# Altium PCB ARM2.22.PcbDoc (part 2 of 2)
Units mil, origin at the board's own origin, x right, y up, seen from the top; angles counter-clockwise.
Board outline 3929.03 x 3937.01 mil, 4 copper layers (Top Layer, GND, VCC, Bottom Layer); 147 components, 96 nets, 586 pads, 207 vias.
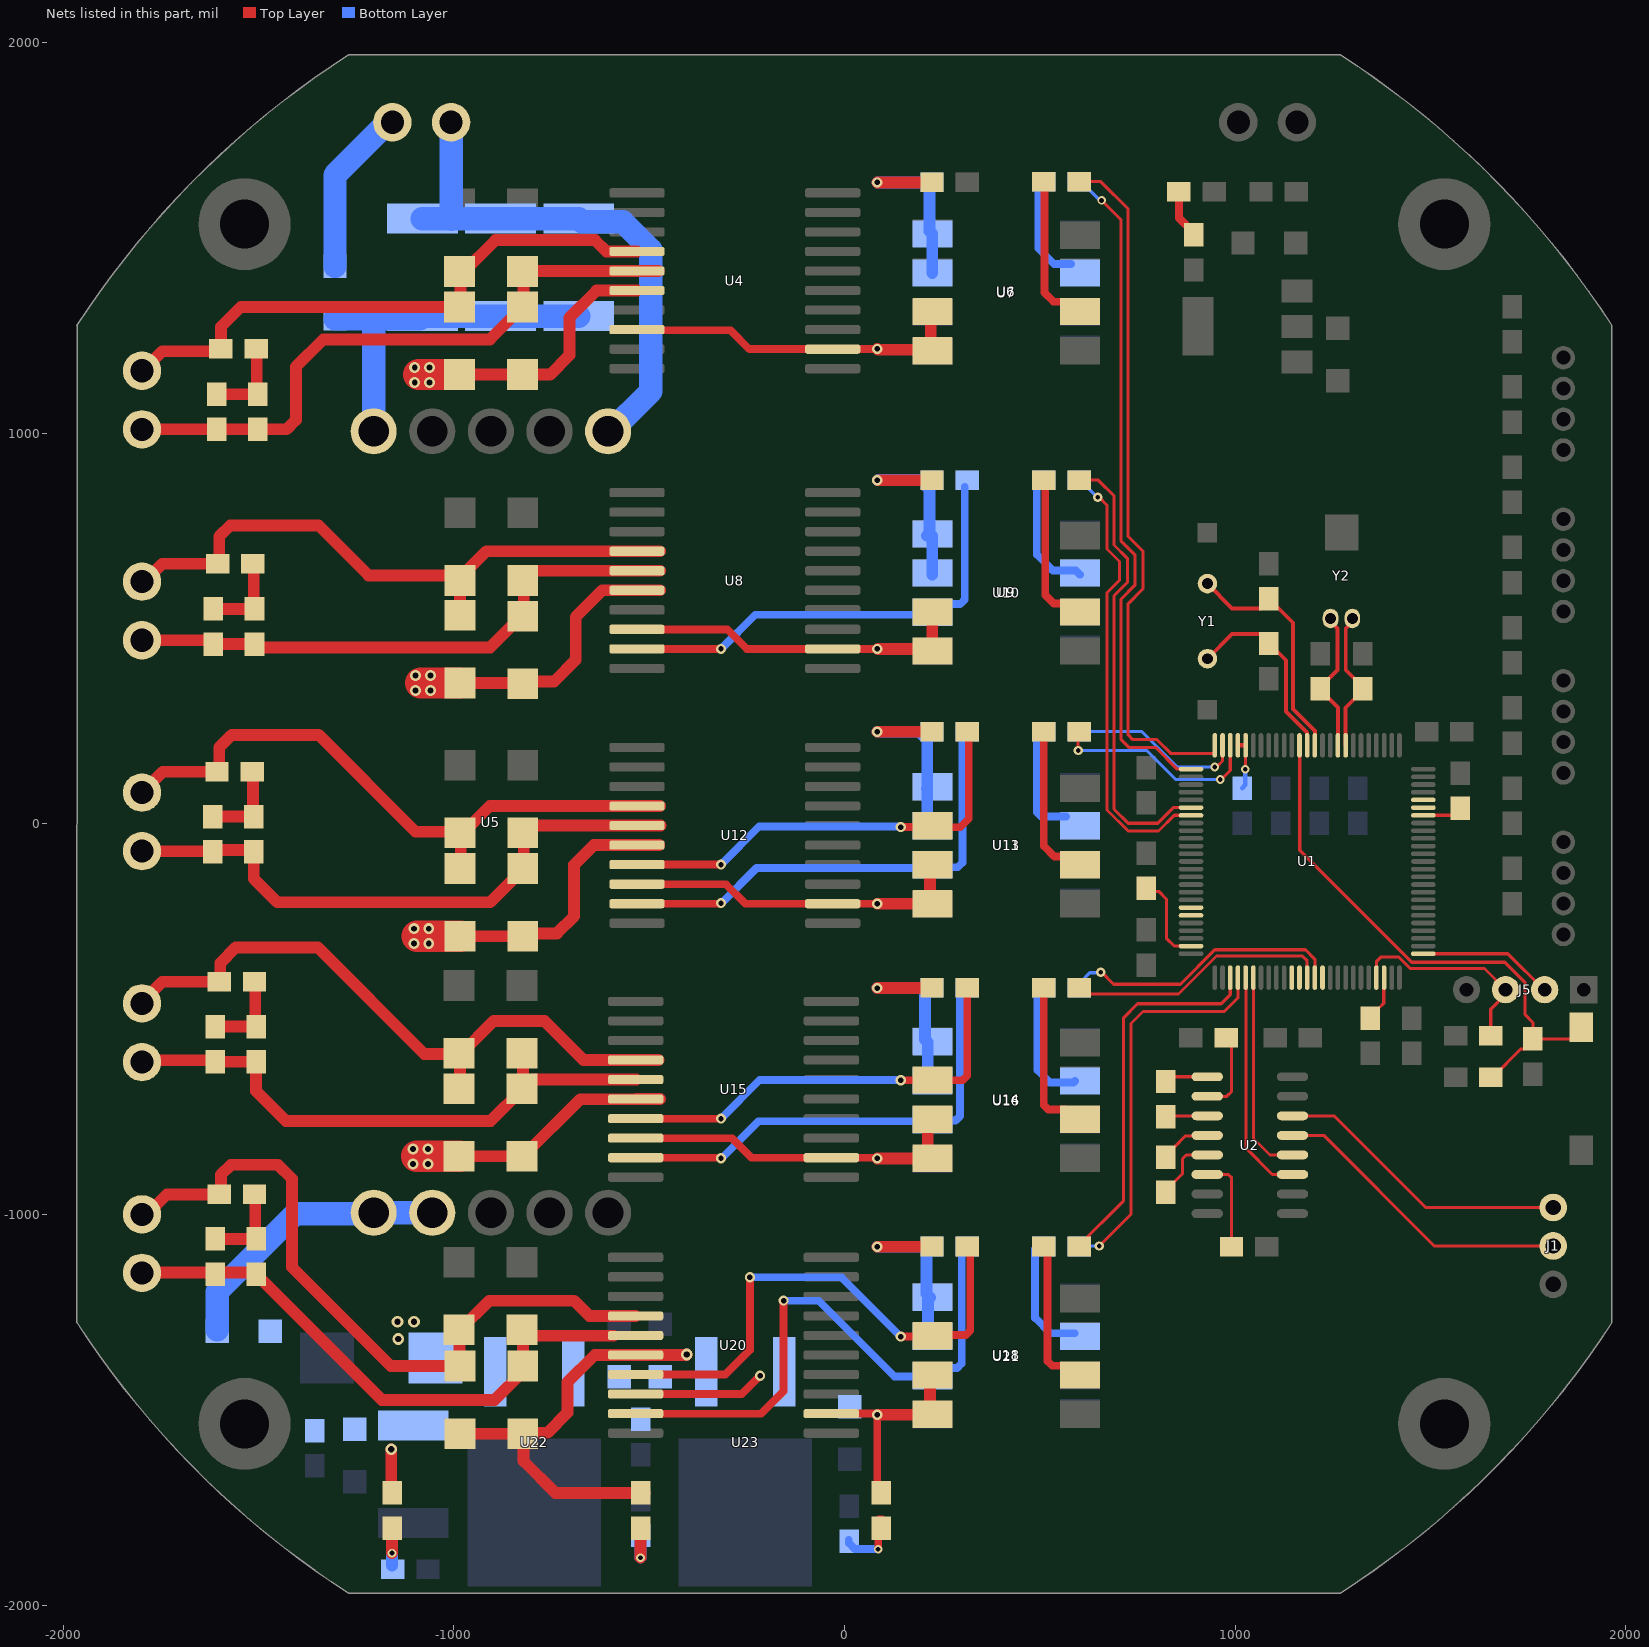
[diagram p4: the nets of this part, all layers, seen from the top]

## Via types
v1: diameter 22, hole 12, Top Layer to Bottom Layer, 101 vias
v2: diameter 26, hole 14, Top Layer to Bottom Layer, 77 vias
v3: diameter 28, hole 15, Top Layer to Bottom Layer, 16 vias
v4: diameter 24, hole 12, Top Layer to Bottom Layer, 8 vias
v5: diameter 30, hole 16, Top Layer to Bottom Layer, 5 vias

## Nets (pads, with @x,y where several pads share a name; then routed paths per layer and width w, separated by ;. In a path a pad name is that pad's centre, name@x,y a point inside that pad or via, vN(x,y) a via of type N, cw(c..) or ccw(c..) an arc to the next point about the centre after c; other vN are vias at no path point) (continued)
IN4: R20.2 U8.9 U10.6 | length 1178.2
  Top Layer w20: U8.9@-531.13,448.21 -531.03,448.11 -316.11,448.11 v2(-316,448)
  Bottom Layer w20: v2(-316,448) -228.28,535.72 U10.6@224.88,535.72 ; U10.6@224.88,537.72 249.92,562.76 295.98,562.76 307.7,574.48 R20.2@307.7,862.19
IN5: R22.2 U11.6 U12.7 | length 1122.1
  Top Layer w20: U12.7@-531.13,-104 v2(-316,-104) ; v2(144,-8) 214.58,-8 216.58,-6 218.86,-8.28 296,-8.28 318,13.72 318,221.32 303,236.32 R22.2@301.38,236.32
  Bottom Layer w20: v2(-316,-104) -218,-6 v2@135.04,-6
IN6: R24.2 U12.9 U13.6 | length 1211.2
  Top Layer w20: U12.9@-531.13,-204 v2@-316,-204
  Bottom Layer w20: v2@-316.77,-201.54 v2(-316,-202.31) -314.53,-202.31 -225,-112.78 U13.6@218.88,-112.78 ; U13.6@218.88,-110.78 289.98,-110.78 301.7,-99.07 R24.2@301.7,236.32
IN7: R27.2 U14.6 U15.7 | length 1118.8
  Top Layer w20: U15.7@-533.13,-754.21 v2@-316,-754.21 ; v2@142.85,-654.85 v2(144,-656) 213.14,-656 213.19,-655.94 302.28,-655.94 314,-644.23 314,-440.21 R27.2@299,-425.21
  Bottom Layer w20: v2(-316,-754) -216.85,-654.85 v2@142.85,-654.85
IN8: R30.2 U15.9 U16.6 | length 1193.6
  Top Layer w20: U15.9@-533.13,-854.21 v2@-316,-854.21
  Bottom Layer w20: v2@-314.38,-855.47 -219.85,-760.95 U16.6@213.22,-760.95 ; U16.6@213.22,-758.95 284.32,-758.95 296.04,-747.23 R30.2@296.04,-425.21
  other v2: -316,-855.47
IN9: R34.2 U18.6 U20.7 | length 1362.9
  Top Layer w20: U20.7@-534.67,-1409.06 -305.06,-1409.06 -242,-1346 v2(-242,-1160) ; v2(144,-1312) 216.64,-1312 220.43,-1308.22 310.28,-1308.22 322,-1296.5 R34.2@322,-1096.35 ; R34.2@309.68,-1081.35 313,-1081.35 R34.2@328,-1096.35
  Bottom Layer w20: v2(-242,-1160) -8,-1160 v2(144,-1312)
IN10: R36.2 U20.9 U21.6 | length 1469.7
  Top Layer w20: U20.9@-534.67,-1509.06 -534.2,-1509.53 -213.53,-1509.53 -156,-1452 v2(-156,-1220)
  Bottom Layer w20: v2(-156,-1220) -66,-1220 127.72,-1413.72 U21.6@218.86,-1413.72 ; U21.6@218.86,-1411.72 238.44,-1392.14 288.28,-1392.14 300,-1380.42 R36.2@300,-1094.65
INPUT1: R13.1 U1.25 | length 1794.4
  Top Layer w8: R13.1@600.36,1644.06 655.94,1644.06 726,1574 726,736 764,698 764,602 726,564 726,228 738,216 800,216 836,180 946.23,180 947.99,181.76 U1.25@947.99,201.37
INPUT2: R16.1 U1.26 | length 1712.3
  Top Layer w8: v1(658,1596) 708,1546 708,724 744,688 744,612 708,576 708,216 728,196 796,196 851.65,140.35 U1.26@886.97,140.35
  Bottom Layer w8: R16.1@599.81,1628.06 621.36,1628.06 650.74,1598.68 655.32,1598.68 v1(658,1596)
INPUT3: R18.1 U1.31 | length 1167.2
  Top Layer w8: R18.1@598,880.19 649.81,880.19 690,840 690,714 724,680 724,618 690,584 690,38 726,2 802,2 841.93,41.93 U1.31@886.97,41.93
INPUT4: R21.1 U1.32 | length 1149.6
  Top Layer w8: v4(648,836) 652,836 672,816 672,704 704,672 704,624 672,592 672,36 726,-18 803.61,-18 843.85,22.24 U1.32@886.97,22.24
  Bottom Layer w8: R21.1@602,862.19 621,862.19 647.19,836 v4(648,836)
INPUT5: R23.1 U1.23 | length 541.8
  Top Layer w8: v4(598,188) R23.1@598,235.68 ; v1(962,114) 964.57,114 987.35,136.78 U1.23@987.35,201.44
  Bottom Layer w8: v4(598,188) 774,188 848,114 v1(962,114)
INPUT6: R26.1 U1.24 | length 455.3
  Top Layer w8: v1(948,146) 950.68,148.68 955.19,148.68 967.67,161.15 U1.24@967.67,201.37 U1.24@967.67,201.37
  Bottom Layer w8: R26.1@596.36,236.32 761.68,236.32 852,146 v1(948,146)
INPUT7: R28.1 U1.63 | length 694.5
  Top Layer w8: R28.1@584.34,-419.21 600.12,-435 855,-435 952,-338 1172,-338 1184.21,-350.21 U1.63@1184.21,-393.11
INPUT8: R31.1 U1.64 | length 728.2
  Top Layer w8: v4(655.98,-379.54) 658.16,-379.54 688.63,-410 860,-410 948,-322 1180,-322 1203.89,-345.89 U1.64@1203.89,-393.11
  Bottom Layer w8: R31.1@604,-416.33 604,-404.55 627.98,-380.57 654.94,-380.57 v4(655.98,-379.54)
INPUT9: R35.1 U1.53 | length 975.3
  Top Layer w8: R35.1@597,-1081.35 714.36,-964 714.36,-495.64 750,-460 964,-460 987.36,-436.64 U1.53@987.36,-393.11
INPUT10: R37.1 U1.54 | length 1014.4
  Top Layer w8: v4(652,-1080) 733.36,-998.64 733.36,-510.64 764,-480 972,-480 1007.04,-444.96 U1.54@1007.04,-393.11
  Bottom Layer w8: R37.1@593.35,-1080 v4(652,-1080)
INPUT_CeTui1: U1.95
INPUT_CeTui2: U1.96
INPUT_CeTui3: U1.44
INPUT_CeTui4: U1.45
INPUT_DuoJi1: U1.61
INPUT_DuoJi2: U1.62
INPUT_ZhuTui: U1.65
NetC8_2: C8.2 U1.49 | length 234.6
  Top Layer w8: C8.2@772,-165 779.31,-172.31 804.31,-172.31 824,-192 824,-292 844.41,-312.41 U1.49@886.97,-312.41
NetC9_2: C9.2 U1.73 | length 110.1
  Top Layer w8: C9.2@1346,-493 1346,-492 1367,-471 1368,-471 1380.33,-458.67 U1.73@1380.33,-397.67
NetC11_1: C11.1 U2.3 | length 106
  Top Layer w8: C11.1@822.59,-747 U2.3@928.55,-747
NetC11_2: C11.2 U2.1 | length 104.6
  Top Layer w8: C11.2@824,-647 U2.1@928.55,-647
NetC14_1: C14.1 U2.2 | length 217.6
  Top Layer w8: U2.2@928.55,-697 978.59,-697 990.59,-685 990.59,-557 C14.1@974.59,-541
NetC19_1: C19.1 U2.5 | length 171.3
  Top Layer w8: C19.1@822.59,-943 822.59,-938 865,-895.59 865,-857 875,-847 U2.5@928.55,-847
NetC19_2: C19.2 U2.4 | length 132.1
  Top Layer w8: C19.2@822.59,-853 822.59,-848 843.59,-827 872.01,-798.58 926.97,-798.58 U2.4@928.55,-797
NetC20_2: C20.2 U2.6 | length 242.4
  Top Layer w8: U2.6@928.55,-897 982.59,-897 990.79,-905.2 C20.2@990.79,-1082
NetC23_1: C23.1 C24.1 C25.1 F1.2 U5.1 | length 905.6
  Bottom Layer w60: F1.2@-1304,1293 -1086.77,1293 C25.1@-1080.15,1299.62 C24.1@-880.15,1299.62 C23.1@-680.15,1299.62 ; U5.1@-1205,1005 -1205,1284
NetC23_2: C23.2 C24.2 C25.2 J9.1 U5.5 | length 1377.6
  Bottom Layer w60: C25.2@-1080.15,1549.62 C25.2@-1007,1549.62 ; C25.2@-1007,1548 C25.2@-1007,1549.62 ; J9.1@-1007,1791.55 C25.2@-1007,1549.62 ; U5.5@-605,998.2 -496,1107.2 -496,1470 -567.24,1541.24 -671.76,1541.24 C23.2@-680.15,1549.62 C24.2@-880.15,1549.62 C25.2@-1007,1549.62
NetDS1_2: DS1.2 DS2.1 R14.1 | length 222.7
  Top Layer w30: DS2.1@-1607,1100 DS1.2@-1502,1100 -1504,1102 -1504,1214 R14.1@-1506,1216
NetDS3_2: DS3.2 DS4.1 R19.1 | length 222.2
  Top Layer w30: DS4.1@-1615,550.5 DS3.2@-1510,550.5 -1512,552.5 -1512,664 R19.1@-1514,666
NetDS5_2: DS5.2 DS6.1 R25.1 | length 221.7
  Top Layer w30: DS6.1@-1617,19 DS5.2@-1512,19 -1514,21 -1514,132 R25.1@-1516,134
NetDS7_2: DS7.2 DS8.1 R32.1 | length 221.2
  Top Layer w30: DS8.1@-1611,-518.5 DS7.2@-1506,-518.5 -1508,-516.5 -1508,-406 R32.1@-1510,-404
NetDS9_2: DS9.2 DS10.1 R38.1 | length 220.7
  Top Layer w30: DS10.1@-1611,-1062 DS9.2@-1506,-1062 -1508,-1060 -1508,-950 R38.1@-1510,-948
NetF1_1: F1.1 J9.2 | length 426.7
  Bottom Layer w60: F1.1@-1304,1428 -1304,1661 J9.2@-1167,1798
NetF2_1: F2.1 U5.9 U5.10 | length 730.7
  Bottom Layer w60: F2.1@-1605,-1294 -1605,-1197 -1405.4,-997.4 -1207.4,-997.4 U5.10@-1205,-995 U5.9@-1055,-995
NetLED1_1: LED1.1 R4.1 | length 125.7
  Top Layer w20: LED1.1@856,1618 856,1551 894,1513 R4.1@894,1508
NetLED2_2: LED2.2 R29.1 | length 96
  Top Layer w30: v1(-1158,-1866) LED2.2@-1158,-1802
  Bottom Layer w30: R29.1@-1158,-1898 v1(-1158,-1866)
NetLED3_2: LED3.2 R41.1 | length 134
  Top Layer w30: v1(-522,-1878) LED3.2@-522,-1802
  Bottom Layer w30: v1(-522,-1878) R41.1@-522,-1820
NetLED4_2: LED4.2 R42.1 | length 174.8
  Top Layer w20: v1(86,-1856) 86.38,-1855.62 86.38,-1782.38 86,-1782 88,-1780 LED4.2@96,-1780
  Bottom Layer w20: R42.1@11,-1832 11,-1840 27,-1856 v1(86,-1856)
NetR2_1: R2.1 U1.94 | length 80.8
  Top Layer w8: U1.94@1481.45,22.24 R2.1@1562.24,22.24
NetR13_2: R13.2 U6.2 | length 341.5
  Top Layer w20: R13.2@512,1630.06 512,1360 535.24,1336.76 U6.2@573.78,1336.76
NetR16_2: R16.2 U7.2 | length 265
  Bottom Layer w20: R16.2@496,1638 496,1474 536.99,1433.01 U7.2@580.05,1433.01
NetR18_2: R18.2 U9.2 | length 372.9
  Top Layer w20: R18.2@508,880.19 514,874.19 514,586 535.73,564.27 U9.2@581.27,564.27
NetR21_2: R21.2 U10.2 | length 329.9
  Bottom Layer w20: R21.2@508,880.19 507,880.19 492,865.19 492,690 533.38,648.62 591.94,648.62 U10.2@602.84,637.72
NetR23_2: R23.2 U11.2 | length 347.4
  Top Layer w20: R23.2@510,218.32 510,-56 537.24,-83.24 U11.2@571.78,-83.24
NetR26_2: R26.2 U13.2 | length 267.7
  Bottom Layer w20: R26.2@492,218.32 492,30.64 503.72,18.92 U13.2@567.14,18.92
NetR28_2: R28.2 U14.2 | length 354.9
  Top Layer w20: R28.2@510,-425.21 510,-719.19 521.72,-730.91 U14.2@566.11,-730.91
NetR31_2: R31.2 U16.2 | length 321.1
  Bottom Layer w20: R31.2@494.34,-419.21 494.34,-630.33 525.44,-661.44 586.56,-661.44 U16.2@590,-658
NetR35_2: R35.2 U18.2 | length 365.1
  Top Layer w20: R35.2@502,-1081.35 505,-1081.35 520,-1096.35 520,-1375.02 531.72,-1386.74 U18.2@577.34,-1386.74
NetR37_2: R37.2 U21.2 | length 306.8
  Bottom Layer w20: R37.2@497.88,-1078 488,-1087.88 488,-1264 527.35,-1303.35 U21.2@588.45,-1303.35
OSC32IN: C17.2 U1.8 Y2.1 | length 367.4
  Top Layer w10: U1.8@1282.64,201.37 1282.64,297.64 1326,341 1326,351 1283,394 1283,500.14 1300,517.14 Y2.1@1300,526
OSC32OUT: C18.2 U1.9 Y2.2 | length 369
  Top Layer w10: Y2.2@1244,526 1244,518.14 1262,500.14 1262,394 1239,371 1238,371 1220,353 1220,339 1238,321 1240,321 1262.95,298.05 U1.9@1262.95,201.37
OSCIN: C15.2 U1.12 Y1.1 | length 620.9
  Top Layer w10: Y1.1@929,615.13 992.13,552 1066,552 1086,572 1086,577 1148,515 1148,294 1203.89,238.11 U1.12@1203.89,201.37
OSCOUT: C16.2 U1.13 Y1.2 | length 495.7
  Top Layer w10: Y1.2@929,423 992,486 1068,486 C16.2@1086,468 ; C16.2@1084,465 1130,419 1130,288 1183.86,234.14 1183.86,201.72 U1.13@1184.21,201.37
OUT1: D1.2 D3.1 J10.1 R14.2 U4.4 | length 1485.7
  Top Layer w30: J10.1@-1796.21,1160 -1746.21,1210 -1602,1210 R14.2@-1596,1216 -1596,1272 -1544.59,1323.41 D1.2@-985.15,1323.41 ; D1.2@-982.85,1323.41 D3.1@-982.85,1406.61 ; D3.1@-975.7,1412.19 -893.09,1494.8 -638.8,1494.8 -609.38,1465.38 U4.4@-531.13,1465.38
OUT2: D2.2 D4.1 DS1.1 DS2.2 J10.2 U4.5 | length 1589
  Top Layer w30: J10.2@-1798,1010 DS1.1@-1502,1010 -1428,1010 -1404,1034 -1404,1170 -1334,1240 -907.41,1240 D2.2@-824,1323.41 ; D4.1@-837.7,1399.09 D4.1@-822.85,1413.94 ; D2.2@-821.7,1347.78 D4.1@-821.7,1401.09 ; D4.1@-807.25,1415.38 U4.5@-531.13,1415.38 U4.5@-476,1415.38
OUT3: D5.2 D7.1 J11.1 R19.2 U8.4 | length 1590.8
  Top Layer w30: J11.1@-1790.96,631.25 -1780.96,631.25 -1746.21,666 R19.2@-1604,666 -1600,670 -1600,736 -1572,764 -1346,764 -1218,636 -990,636 -984.26,630.26 D7.1@-982,628 ; D7.1@-987.17,627.35 -916.31,698.21 U8.4@-531.13,698.21 U8.4@-472,698.21 ; D5.2@-984.3,540 D7.1@-984.3,623.35 D7.1@-984.3,627.35
OUT4: D6.2 D8.1 DS3.1 DS4.2 J11.2 U8.5 | length 1428.8
  Top Layer w30: J11.2@-1798,470.25 -1624.75,470.25 DS4.2@-1615,460.5 DS3.1@-1510,460.5 DS3.1@-1510,455.5 ; -1481.63,452 -906.85,452 -820.85,538 D8.1@-820.85,627.35 ; D8.1@-817.99,648.21 U8.5@-531.13,648.21 U8.5@-472,648.21
OUT5: D9.2 D11.1 J12.1 R25.2 U12.4 | length 1671.9
  Top Layer w30: J12.1@-1798,80.5 -1744.5,134 R25.2@-1606,134 -1600,140 -1600,196 -1568,228 -1346,228 -1098,-20 -986,-20 D11.1@-981.83,-24.17 ; D9.2@-1006.3,-136 D9.2@-984.3,-114 ; D9.2@-982,-114 -982,-28.65 -907.35,46 U12.4@-531.13,46 U12.4@-472,46
OUT6: D10.2 D12.1 DS5.1 DS6.2 J12.2 U12.5 | length 1561.5
  Top Layer w30: J12.2@-1798,-69.5 DS6.2@-1625,-69.5 ; DS6.2@-1627,-57.5 -1617,-67.5 DS6.2@-1617,-71 ; DS6.2@-1617,-66.5 DS5.1@-1512,-66.5 ; DS5.1@-1512,-71 -1512,-140 -1452,-200 -906.85,-200 -820.85,-114 -820.85,-30.65 -794.2,-4 U12.5@-531.13,-4 U12.5@-470,-4
OUT7: D13.2 D15.1 J14.1 R32.2 U15.4 | length 1678.1
  Top Layer w30: J14.1@-1796,-444.25 -1786.46,-444.25 -1746.21,-404 R32.2@-1600,-404 -1598,-402 -1598,-356 -1558,-316 -1348,-316 -1075.35,-588.65 -993.35,-588.65 -991.35,-590.65 D15.1@-984,-590.65 ; D13.2@-984,-677.39 D15.1@-984,-590.65 ; U15.4@-476,-604 -532.92,-604 -533.13,-604.21 -667.79,-604.21 -768,-504 -897.35,-504 D15.1@-984,-590.65
OUT8: D14.2 D16.1 DS7.1 DS8.2 J14.2 U15.5 | length 1503.5
  Top Layer w30: J14.2@-1798,-609.25 -1793.25,-604.5 DS8.2@-1611,-604.5 ; DS8.2@-1611,-608.5 DS7.1@-1506,-608.5 -1506,-684 -1430,-760 -905.46,-760 -822.85,-677.39 D16.1@-822.85,-590.65 ; D14.2@-821.85,-677.58 -798.48,-654.21 U15.5@-533.13,-654.21
OUT9: D18.2 D20.1 J15.1 R38.2 U20.4 | length 1811.8
  Top Layer w30: J15.1@-1798,-999 -1785,-999 -1734,-948 R38.2@-1600,-948 -1596,-944 -1596,-898 -1570,-872 -1450,-872 -1414,-908 -1414,-1134 -1160.61,-1387.39 D18.2@-984.3,-1387.39 ; D18.2@-986.3,-1370 -985.3,-1369 -985.3,-1295.61 D20.1@-986.3,-1294.61 ; D20.1@-984,-1294.61 -909.39,-1220 -692,-1220 -652.94,-1259.06 U20.4@-534.67,-1259.06
OUT10: D19.2 D21.1 DS9.1 DS10.2 J15.2 U20.5 | length 1475.9
  Top Layer w30: J15.2@-1796,-1148 -1611,-1148 DS9.1@-1502,-1148 ; DS9.1@-1506,-1152 -1506,-1157 -1496,-1167 -1491,-1167 -1184,-1474 -895.46,-1474 -822.85,-1401.39 D21.1@-822.85,-1310 ; D21.1@-825.15,-1294.61 -809.76,-1310 U20.5@-590.54,-1310
RST: C21.1 K1.1 R3.1 U1.14 | length 1428.7
  Top Layer w8: U1.14@1164.52,201.37 1165.25,200.72 1165.25,-67.25 1452,-354 1690,-354 1742,-406 1742,-488 1762,-508 C21.1@1762,-550 ; R3.1@1654,-648 1659,-648 1731,-576 1741,-576 1762,-555 C21.1@1762,-550 ; K1.1@1885.74,-520 1885.74,-524.47 1860.21,-550 C21.1@1762,-550
RXA: J1.2 U2.13 | length 784.6
  Top Layer w8: U2.13@1146.59,-797 1226.59,-797 1509.59,-1080 J1.2@1814,-1080
RXD: U1.56 U2.12 | length 528.9
  Top Layer w8: U1.56@1047,-393.11 1047,-805 1089,-847 U2.12@1146.59,-847
SWCLK: J5.2 U1.76 | length 354.7
  Top Layer w8: U1.76@1481.45,-332.09 1698,-332.09 1791.5,-425.59 J5.2@1791.5,-431.5
SWDIO: J5.3 R11.1 U1.72 | length 537.2
  Top Layer w8: U1.72@1361.38,-393.11 1361.38,-352.62 1374,-340 1418,-340 1448,-370 1638,-370 J5.3@1692,-424 ; R11.1@1654,-542 1654,-473.84 1691.5,-436.34 J5.3@1691.5,-431.5
TXA: J1.1 U2.14 | length 764.6
  Top Layer w8: U2.14@1146.59,-747 1253,-747 1487.59,-981.59 J1.1@1814,-981.59
TXD: U1.55 U2.11 | length 583.3
  Top Layer w8: U1.55@1027.32,-393.11 1027.32,-829 1095.32,-897 U2.11@1146.59,-897
VCC_5V: C32.1 LED4.1 R12.1 R15.1 R17.1 R20.1 R22.1 R24.1 R27.1 R30.1 R34.1 R36.1 U4.8 U4.12 U6.7 U6.8 U7.7 U7.8 U8.8 U8.12 U9.7 U9.8 U10.7 U10.8 U11.7 U11.8 U12.8 U12.12 U13.7 U13.8 U14.7 U14.8 U15.8 U15.12 U16.7 U16.8 U18.7 U18.8 U20.8 U20.12 U21.7 U21.8 U23.3 | length 6791.1
  Top Layer w20: U15.8@-533.13,-804.21 -287.79,-804.21 -238,-854 80.92,-854 82.92,-856 v2(84,-856) ; U20.8@-532.8,-1459.06 -263.06,-1459.06 v2(-216,-1412) ; U12.8@-531.13,-154 -303.5,-154 -253.5,-204 v2(84,-204) ; U8.8@-531.13,498.21 -300.21,498.21 -250.21,448.21 U8.12@-30.27,448.21 ; U4.8@-529.32,1263.57 -291.57,1263.57 -243.38,1215.38 U4.12@-47.96,1215.38 ; U4.12@-47.96,1215.69 -30.27,1215.69 83.69,1215.69 v2(84,1216) ; U4.12@-30.27,1215.38 U4.12@-29.96,1215.69 ; U20.12@-30,-1509.06 79.98,-1509.06 82.92,-1512 v2(84,-1512) LED4.1@84,-1712 ; U8.12@-28.46,448.21 -28.35,448.11 85.89,448.11 v2@86,448
  Top Layer w30: v2(84,-1512) U18.8@218.58,-1512 ; v2(84,-1082) R34.1@216.11,-1082 ; v2(84,-856) U14.8@208.63,-856 ; v2(84,-420) R27.1@198.82,-420 ; v2(84,-204) U11.8@212.3,-204 ; v2(84,236) R22.1@217.53,236 ; v2(84,1216) 86,1214 218.58,1214 220.86,1211.72 U6.7@220.86,1311.72 ; v2(84,1642) R12.1@197.02,1642 ; v2@86,448 219.58,448 224.86,442.72 U9.7@224.86,539.72 ; v2@86,880 199.89,880 R17.1@201.89,878 ; U14.8@213.19,-855.28 U14.7@213.19,-755.28 ; U18.8@218.86,-1510.28 U18.7@218.86,-1412.28 ; U11.8@218.86,-204.28 U11.7@218.86,-104.28
  Bottom Layer w30: v2(84,-1082) 207.7,-1082 R36.1@215.7,-1090 ; v2(84,-420) 84.79,-419.21 R30.1@208.04,-419.21 ; v2(84,236) 191.7,236 R24.1@211.7,216 ; v2(84,1642) 84.06,1642.06 R15.1@224.04,1642.06 ; v2@86,880 86.19,880.19 R20.1@219.68,880.19 ; R30.1@208.82,-424 206.04,-426.79 206.04,-551.77 213.22,-558.95 U16.7@213.22,-658.95 ; R36.1@209.7,-1090 209.7,-1202.56 U21.8@218.86,-1211.72 ; R20.1@210,864 R20.1@214,860 ; U10.8@210.52,737.72 217.7,744.9 R20.1@217.7,858.3 ; U13.8@210.92,90 U13.8@211.7,89.22 ; R24.1@211.7,218.32 U13.8@211.7,89.22 ; U21.8@213.7,-1211.72 213.7,-1306.56 U21.7@218.86,-1311.72 ; R15.1@217.7,1630 217.7,1517.4 224.88,1510.22 U7.7@224.88,1410.22 ; U13.7@218.88,-10.78 211.7,-3.6 U13.8@211.7,89.22 ; U10.8@223.65,736.48 224.88,737.72 U10.7@224.88,637.72
  other v2: 84,448 84,880
VCC_12V: C28.2 C30.1 C31.1 D18.1 D19.1 LED3.1 U20.6 U22.3 U23.1 | length 1122
  Top Layer w30: D18.1@-982,-1560.61 D19.1@-823.15,-1560.61 D19.1@-821.57,-1560.61 ; D19.1@-822,-1558 -821.57,-1558.43 D19.1@-821.57,-1560.61 ; D19.1@-820.24,-1560 -818.24,-1558 -760,-1558 -709,-1507 -709,-1429 -639.06,-1359.06 -405.06,-1359.06 v5(-404,-1358) ; LED3.1@-512,-1712 -740,-1712 -821.57,-1630.43 D19.1@-821.57,-1560.61
VCC_24V: C26.1 C27.2 C29.1 D1.1 D2.1 D5.1 D6.1 D9.1 D10.1 D13.1 D14.1 F2.2 LED2.1 TVS1.2 U4.6 U8.6 U12.6 U15.6 U22.1 | length 3059.1
  Top Layer w30: LED2.1@-1160,-1710 v5(-1160,-1600) ; D5.1@-984.3,360.78 D6.1@-825.15,360.78 ; D13.1@-984,-850.61 D14.1@-825.15,-850.61 -822.85,-850.61 -676.45,-704.21 -533.13,-704.21 -532.92,-704 U15.6@-472,-704 ; D1.1@-982.85,1150.19 D2.1@-824,1150.19 -753.46,1150.19 -704,1199.65 -704,1296 -634.62,1365.38 U4.6@-531.13,1365.38 ; D9.1@-982,-287.22 D10.1@-823.15,-287.22 -820.85,-287.22 -813.63,-280 -736,-280 -692,-236 -692,-104 -642,-54 U12.6@-531.13,-54 U12.6@-474,-54 ; D6.1@-820.85,364.78 -743.22,364.78 -688,420 -688,530 -619.79,598.21 U8.6@-531.13,598.21 U8.6@-472,598.21
  Top Layer w80: -1095.39,-850.61 D13.1@-986.3,-850.61 D13.1@-984,-850.61 ; -1093.39,-287.22 D9.1@-984.3,-287.22 D9.1@-982,-287.22 ; -1089.46,1150.19 D1.1@-985.15,1150.19 ; -1085.22,360.78 D5.1@-984.3,360.78
  other v3: -1104,-870 -1066,-870 -1104,-832 -1066,-832 -1102,-306 -1064,-306 -1102,-268 -1064,-268 -1098,342 -1060,342 -1098,380 -1060,380 -1100,1130 -1062,1130 -1100,1168 -1062,1168
  other v5: -1142,-1318 -1144,-1274 -1102,-1274
VDD: R1.1 U1.21 U1.22 | length 122.8
  Top Layer w8: v1@1026,150 1026.36,150.36 1026.36,201.08 U1.21@1026.73,201.37
  Top Layer w12: U1.22@1007.04,201.37 U1.21@1026.73,201.37
  Bottom Layer w12: R1.1@1018,92 1026,100 v1(1026,140)
pads on no net: U1.1 U1.2 U1.3 U1.4 U1.5 U1.7 U1.15 U1.16 U1.17 U1.18 U1.29 U1.30 U1.33 U1.34 U1.35 U1.36 U1.37 U1.38 U1.39 U1.40 U1.41 U1.42 U1.43 U1.46 U1.47 U1.48 U1.51 U1.52 U1.57 U1.58 U1.59 U1.60 U1.66 U1.69 U1.70 U1.71 U1.78 U1.79 U1.80 U1.81 U1.82 U1.83 U1.84 U1.85 U1.86 U1.87 U1.88 U1.97 U1.98 U2.7 U2.8 U2.9 U2.10 U4.3 U4.13 U4.14 U4.15 U4.16 U4.17 U4.18 U5.2 U5.3 U5.4 U5.8 U6.1 U6.4 U7.1 U7.4 U8.3 U8.13 U8.14 U8.15 U8.16 U8.17 U8.18 U9.1 U9.4 U10.1 U10.4 U11.1 U11.4 U12.3 U12.13 U12.14 U12.15 U12.16 U12.17 U12.18 U13.1 U13.4 U14.1 U14.4 U15.3 U15.13 U15.14 U15.15 U15.16 U15.17 U15.18 U16.1 U16.4 U18.1 U18.4 U20.3 U20.13 U20.14 U20.15 U20.16 U20.17 U20.18 U21.1 U21.4 Y1. Y2.
copper on no net:
  other v1: 916,898 1052,898 1188,898 916,1034 1052,1034 1188,1034

## Polygon pours and split planes (outlines as drawn)
VCC_24V on VCC "VCC-VCC_24V" (solid, remove dead copper, pour order 155): -1441.29,-1149.3 -1185.29,-1342 -1118,-1342 -1074,-1298 -1074,-1257.48 -1357.98,-1066 -1357.98,-901.92 -1341.29,-890 -1048.57,-890 -1037.44,-881.34 -1037.44,-821.12 -1050.14,-810 -1337.29,-810 -1357.98,-789.31 -1357.98,-358.27 -1315.6,-328 -1053.14,-328 -1034,-313.11 -1034,-268.25 -1057.14,-248 -1320,-248 -1357.98,-210.02 -1357.98,302.02 -1332.8,320 -1045.71,320 -1030,332.22 -1030,389.25 -1049.14,406 -1330,406 -1357.98,433.98 -1357.98,1069.91 -1322.7,1108 -1053.94,1110.01 -1034,1126.05 -1034,1179.33 -1054.71,1194 -1357.98,1194 -1441.29,1108
VCC_5V on VCC "VCC-VCC_5V" (solid, remove dead copper, pour order 157): 72,-1538 94,-1538 104,-1528 104,1654.67 95.2,1662 72.82,1662 61.95,1652.98 61.95,-1527.95
GND2 on Bottom Layer "Bottom Layer-No Net" (solid, remove dead copper, pour order 191): -49.64,-1956 83.92,-1956 386,-1731.99 386,1725.99 90.66,1945 -1275.67,1945 -1336,1856.51 -1336,-1606 -1383,-1606 -1396,-1619 -1396,-1774.51 -1272.26,-1956 -981.71,-1956 -598.55,-1956 -450.35,-1956
GND1 on Bottom Layer "Top Layer-GND1" (solid, remove dead copper, pour order 187): 1654.34,-1318 1866,-1318 1956,-1228 1956,1258.7 1880.7,1334 1608.62,1334 1386,1414 1386,1773.12 1266.91,1947.79 703.82,1947.79 424,1740.28 424,-1751.69 689.02,-1948.21 1266.91,-1948.21 1386,-1773.55 1386,-1414.43
VCC_12V on Bottom Layer "Bottom Layer-VCC_12V" (solid, remove dead copper, pour order 146): -553.85,-1545.74 -544.1,-1558 -500.6,-1558 -489.9,-1547.3 -489.9,-1504.93 -463.7,-1492 -326.86,-1492 -317.86,-1486 -317.85,-1307.92 -389.92,-1307.92 -460,-1378 -641.7,-1378 -659.21,-1346.77 -659.21,-1312.99 -665.11,-1304.13 -721.35,-1304.13 -727.21,-1309.99 -727.21,-1482.99 -720,-1492 -574,-1492 -553.85,-1507.89
VCC_5V on Bottom Layer "Bottom Layer-VCC_5V" (solid, remove dead copper, pour order 165): -192,-1486 -182,-1496 -120,-1496 28.4,-1538 60.18,-1538 94,-1538 104,-1528 104,-1496 62,-1454 7.52,-1454 -102,-1355.47 -114,-1343.47 -114,-1317.47 -125.47,-1306 -180,-1306 -192,-1318 -192,-1381.74 -240,-1394.26 -240,-1427.47 -192,-1439.52
VCC_24V on Bottom Layer "Bottom Layer-VCC_24V" (solid, remove dead copper, pour order 167): -1440.89,-1332 -1432.89,-1324 -1432.89,-1266 -1412.89,-1246 -1228.89,-1246 -1166.89,-1308 -1166.89,-1346 -1166.63,-1346 -1166.63,-1473.15 -1180.84,-1496 -1269.36,-1496 -1291.11,-1517.74 -1376.99,-1517.74 -1384.89,-1526.36 -1384.89,-1580 -1379.15,-1585.74 -1212.26,-1585.74 -1174,-1624 -1146,-1624 -1107.74,-1585.74 -1015.4,-1585.74 -1008.89,-1576.99 -1008.89,-1510.97 -996,-1496 -868.22,-1496 -858.89,-1488 -858.89,-1312.29 -1202.89,-1180 -1424.89,-1180 -1504.89,-1260 -1504.89,-1326 -1498.89,-1332
GND1 on GND "GND-GND1" (solid, remove dead copper, pour order 188): 1654.34,-1318 1866,-1318 1951.78,-1232.22 1951.78,1262.92 1880.7,1334 1608.62,1334 1386,1414 1386,1773.12 1266.91,1947.79 703.82,1947.79 426,1741.77 426,-1753.17 689.02,-1948.21 1266.91,-1948.21 1386,-1773.55 1386,-1414.43
GND2 on GND "VCC-GND2" (solid, remove dead copper, pour order 189): -1678.76,-1315.16 -1394.76,-1417.21 -1394.76,-1776.33 -1272.26,-1956 83.92,-1956 386,-1731.99 386,1725.99 90.66,1945 -1275.67,1945 -1394.76,1770.33 -1394.76,1411.21 -1678.76,1309.16 -1678.76,-3

## Other copper
Top Layer:
  pour cut-out: 662,-1181.68 499.64,-1181.68 499.64,-1041.68 662,-1041.68
  pour cut-out: 655.98,-519.54 496.98,-519.54 496.98,-379.54 655.98,-379.54
  pour cut-out: 1078,1870 1078,1722 1238,1722 1238,1870
  pour cut-out: 663,136 504,136 504,276 663,276
  pour cut-out: 669,782 564,782 564,920 669,920
  pour cut-out: 666,1556 536,1556 536,1684 666,1684
GND:
  pour cut-out: 880.2,263.98 978,263.98 978,299.98 976,301.98 1022.16,348.14 1033.01,358.99 1028,687.34 978.44,736.9 978.44,783.54 978,783.98 882,783.98 882,740.91 882.52,740.39 830,687.86 830,348.14 832.04,348.14 880.2,299.98
  pour cut-out: 1210,487.78 1336.04,487.78 1336.04,794.26 1212.04,794.26 1210.04,796.26 1210,796.22
  pour cut-out: 1541.57,-491 1840,-491 1840,-357 1541.57,-357
  pour cut-out: 1770,-1.13 1770,-244 1904,-244 1904,-1.13
  pour cut-out: 1770,412.2 1770,169.33 1904,169.33 1904,412.2
  pour cut-out: 1770,825.53 1770,582.67 1904,582.67 1904,825.53
  pour cut-out: 1770,1238.87 1770,996 1904,996 1904,1238.87
  pour cut-out: 37.92,1689.5 37.92,1590.5 132,1590.5 132,1689.5
  pour cut-out: 37.92,1263.5 37.92,1164.5 132,1164.5 132,1263.5
  pour cut-out: 39.92,927.5 39.92,828.5 134,828.5 134,927.5
  pour cut-out: 39.92,495.5 39.92,396.5 134,396.5 134,495.5
  pour cut-out: 37.92,283.5 37.92,184.5 132,184.5 132,283.5
  pour cut-out: 37.92,-156.5 37.92,-255.5 132,-255.5 132,-156.5
  pour cut-out: 37.92,-372.5 37.92,-471.5 132,-471.5 132,-372.5
  pour cut-out: 37.92,-808.5 37.92,-907.5 132,-907.5 132,-808.5
  pour cut-out: 37.92,-1034.5 37.92,-1133.5 132,-1133.5 132,-1034.5
  pour cut-out: 37.92,-1464.5 37.92,-1563.5 132,-1563.5 132,-1464.5
  pour cut-out: -262.08,-1364.5 -262.08,-1463.5 -168,-1463.5 -168,-1364.5
  pour cut-out: 44,-1797 44,-1896 138.08,-1896 138.08,-1797
  pour cut-out: -568.08,-1830.5 -568.08,-1929.5 -474,-1929.5 -474,-1830.5
  pour cut-out: -1204.08,-1818.5 -1204.08,-1917.5 -1110,-1917.5 -1110,-1818.5
  pour cut-out: -1248.5,1900 -1248.5,1693 -912,1693 -912,1900
  pour cut-out: -1217.5,-1201 -1217.5,-1397 -1028.5,-1397 -1028.5,-1201
  pour cut-out: -1177.5,-755 -1177.5,-951 -988.5,-951 -988.5,-755
  pour cut-out: -1326,-896 -1326,-1104 -905,-1104 -905,-896
  pour cut-out: -1175.5,-193 -1175.5,-389 -986.5,-389 -986.5,-193
  pour cut-out: -1169.5,457 -1169.5,261 -980.5,261 -980.5,457
  pour cut-out: -1175.5,1249 -1175.5,1008 -986.5,1008 -986.5,1249
  pour cut-out: -1296.5,1098 -1296.5,902 -900,902 -900,1098
  pour cut-out: -755,1098 -755,902 -507.5,902 -507.5,1098
VCC:
  pour cut-out: 1078,1870 1078,1722 1238,1722 1238,1870
Bottom Layer:
  pour cut-out: 286,-1173.55 286,-1034.52 154,-1034.52 154,-1173.55
  pour cut-out: 286,-511.41 286,-372.38 154,-372.38 154,-511.41
  pour cut-out: 286,144.13 286,283.16 156,283.16 156,144.13
  pour cut-out: 286,788 286,927.03 154,927.03 154,788
  pour cut-out: 286,1563.35 286,1688.9 154,1688.9 154,1563.35
  pour cut-out: 880.2,263.98 978,263.98 978,299.98 1033.07,355.05 1028,687.34 978.44,736.9 978.44,783.54 978,783.98 882,783.98 882,740.91 882.52,740.39 830,687.86 830,348.14 832.04,348.14 880.2,299.98
  pour cut-out: 1210,487.78 1336.04,487.78 1336.04,794.26 1212.04,794.26 1210.04,796.26 1210,796.22
  pour cut-out: 1770,1238.87 1770,996 1904,996 1904,1238.87
  pour cut-out: 1770,825.53 1770,582.67 1904,582.67 1904,825.53
  pour cut-out: 1770,412.2 1770,169.33 1904,169.33 1904,412.2
  pour cut-out: 1770,-1.13 1770,-244 1904,-244 1904,-1.13
  pour cut-out: 1541.57,-491 1840,-491 1840,-357 1541.57,-357
  pour cut-out: 1090,1694 1269.8,1694 1269.8,1904 1090,1904
  pour cut-out: 688.36,1560 688.36,1683.42 465.36,1683.42 465.36,1560
  pour cut-out: 678,794 678,919.55 463,919.55 463,794
  pour cut-out: 664,144 664,275.68 461.36,275.68 461.36,144
  pour cut-out: 672.34,-514 672.34,-352 450,-352 450,-514
  pour cut-out: 680,-1160 680,-1042 466,-1042 466,-1160
  pour cut-out: -264.61,-1169.36 -255.24,-1160 -8,-1160 152,-1320 152,-1400 140,-1412 -52,-1220 -180.47,-1220 -216,-1184.47 -242,-1184.47
  pour cut-out: -340,-746.03 -340,-861.36 -325.36,-861.36 -222,-758 176,-758 176,-666 168,-658 -251.97,-658
  pour cut-out: -340,-96.03 -340,-211.36 -325.36,-211.36 -222,-108 176,-108 176,-16 168,-8 -251.97,-8
  pour cut-out: -340,555.97 -340,440.64 -325.36,440.64 -222,544 176,544 176,636 168,644 -251.97,644
  pour cut-out: -338.61,1325.36 -338.61,1208.64 -325.36,1208.64 -222,1312 176,1312 176,1404 168,1412 -251.97,1412
  pour cut-out: -1398,-1487.63 -1398,-1278.09 -1206,-1278.72 -1206,-1488.26
  pour cut-out: -908.78,-1187.22 -826,-1270 -826,-1504.52 -847.74,-1526.26 -857.81,-1526.26 -851.63,-1301.63 -1142,-1176
  pour cut-out: -1269.81,1964.44 -869.43,1964.44 -870.59,1612 -1270.97,1612
  pour cut-out: -1352.16,1624 -430.58,1624 -432.96,900 -1354.55,900
  pour cut-out: 109.86,-1878 -21.97,-1878 -21.68,-1792 110.14,-1792
  pour cut-out: -562,-1901.4 -562,-1781.86 -476,-1782.14 -476,-1901.68
  pour cut-out: -1206,-1960.36 -1206,-1840.49 -1112,-1840.8 -1112,-1960.67
  pour cut-out: -1346,-1181.99 -1346,924.84 -970,923.61 -970,-1183.22
  pour cut-out: -411,-1340 -449,-1378 -460,-1378 -389.92,-1307.92
  pour cut-out: -995.55,-1517.84 -994.91,-1517.62 -995.55,-1517.74

## Silkscreen, mask and mechanical layers (free items; w line width, h text height)
Top Overlay:
  text "5V" at 832,1894 h30
  text "24V" at -876,1886 h30
  text "+" at 1272,1822.5 h45
  text "-" at 842,1819.51 h45
  text "+" at -1320,1774.5 h45
  text "-" at -876,1769.51 h45
  text "3.3+" at 684,1618 h30
  text "+" at 1196,1423 h30
  text "+" at 1304,1305 h30
  text "G-V-B-A" at 1822,1282 h25 r90
  text "Jian+" at -1920,1264 h30
  text "Jian" at 1432,1228 h30
  text "-" at -1644,1225.51 h45
  text "+" at -1648,900.5 h45
  text "DaBi" at 1448,794 h30
  text "Dabi+" at -1954,724 h30
  text "XiaoBi" at 1418,398 h30
  text "Xiaobi+" at -1955.48,174.79 h30
  text "Wan" at 1538,-158 h30
  text "Wan+" at -1950,-358 h30
  text "V-D-C-G" at 1536.03,-370 h30
  text "Zhua+" at -1954,-896 h30
  text "232" at 1550.69,-954 h30
  text "G-R-T" at 1700,-1137.98 h30 r90
  text "24+" at -1084,-1706 h30
  text "12+" at -432,-1706 h30
  text "5+" at 164,-1706 h30
  text "zkk24/2/22" at 734,-1850 h45
Bottom Overlay:
  text "+" at -1044,1347 h30
  text "+" at -838,1347 h30
  text "+" at -640,1343 h30
  text "+" at -988,-1257 h30 r180
  text "+" at -28,-1429 h30 r180
  text "+" at -412,-1449 h30 r180
  text "+" at -616,-1451 h30 r180
  text "+" at -1052,-1615 h30
  text "+" at -1240,-1617 h30
Mechanical 1:
  lines w6: -1964.6,1275.83 cw(c0,0) -1269.8,1968.5 1269.8,1968.5 cw(c0,0) 1964.34,1276.22 ; -1964.34,-1276.22 ccw(c0,0) -1269.8,-1968.5 1269.8,-1968.5 ccw(c0,0) 1964.42,-1276.1 ; -1964,-1276 -1964,1275.83 ; 1964,-1275.81 1964,1276